# EAGLE board FR4 Panel Rev E.brd (EAGLE 7.2.0), part 1 of 2
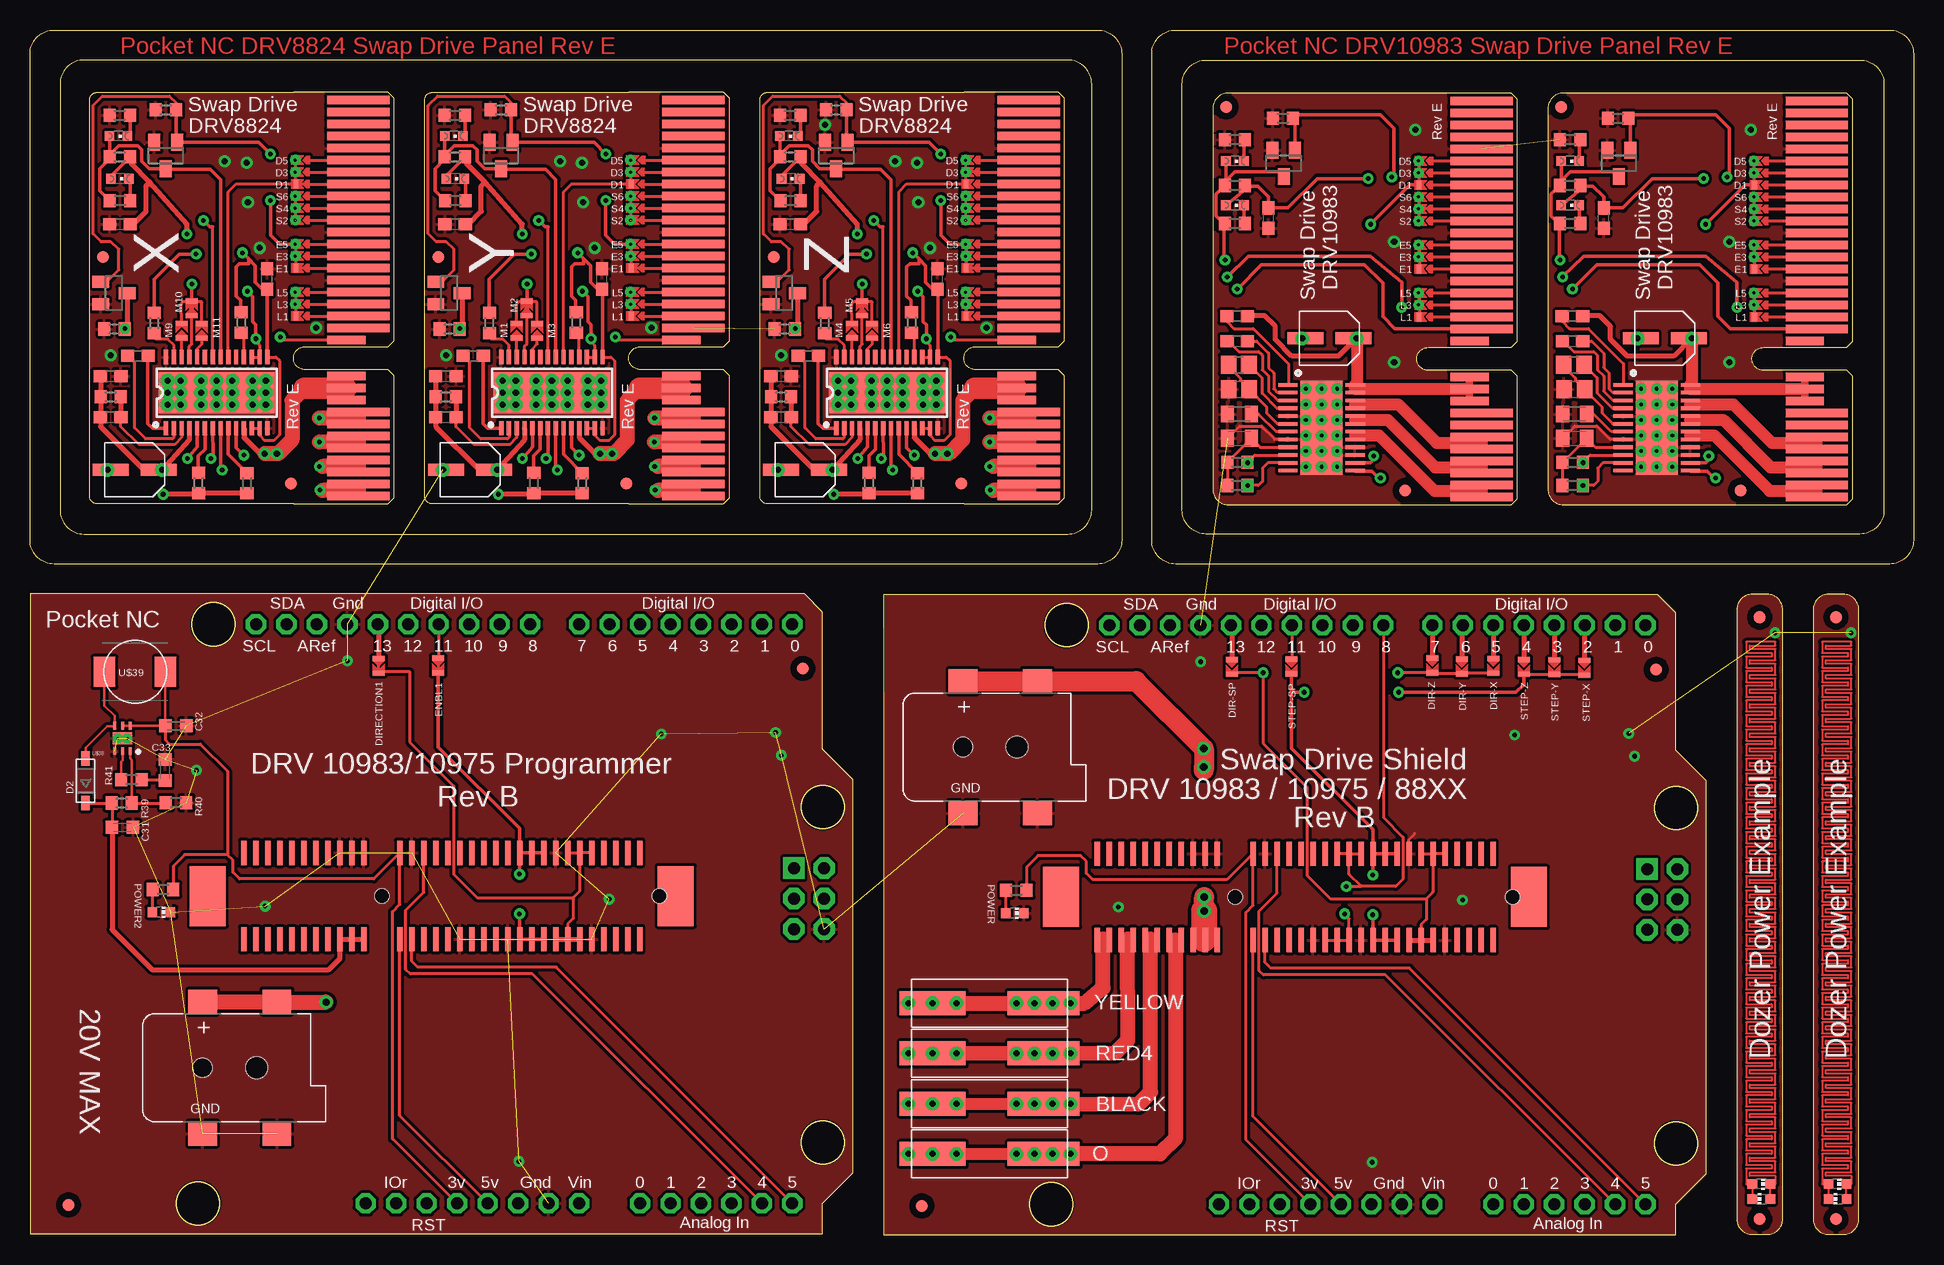
[diagram p0: board, top side]
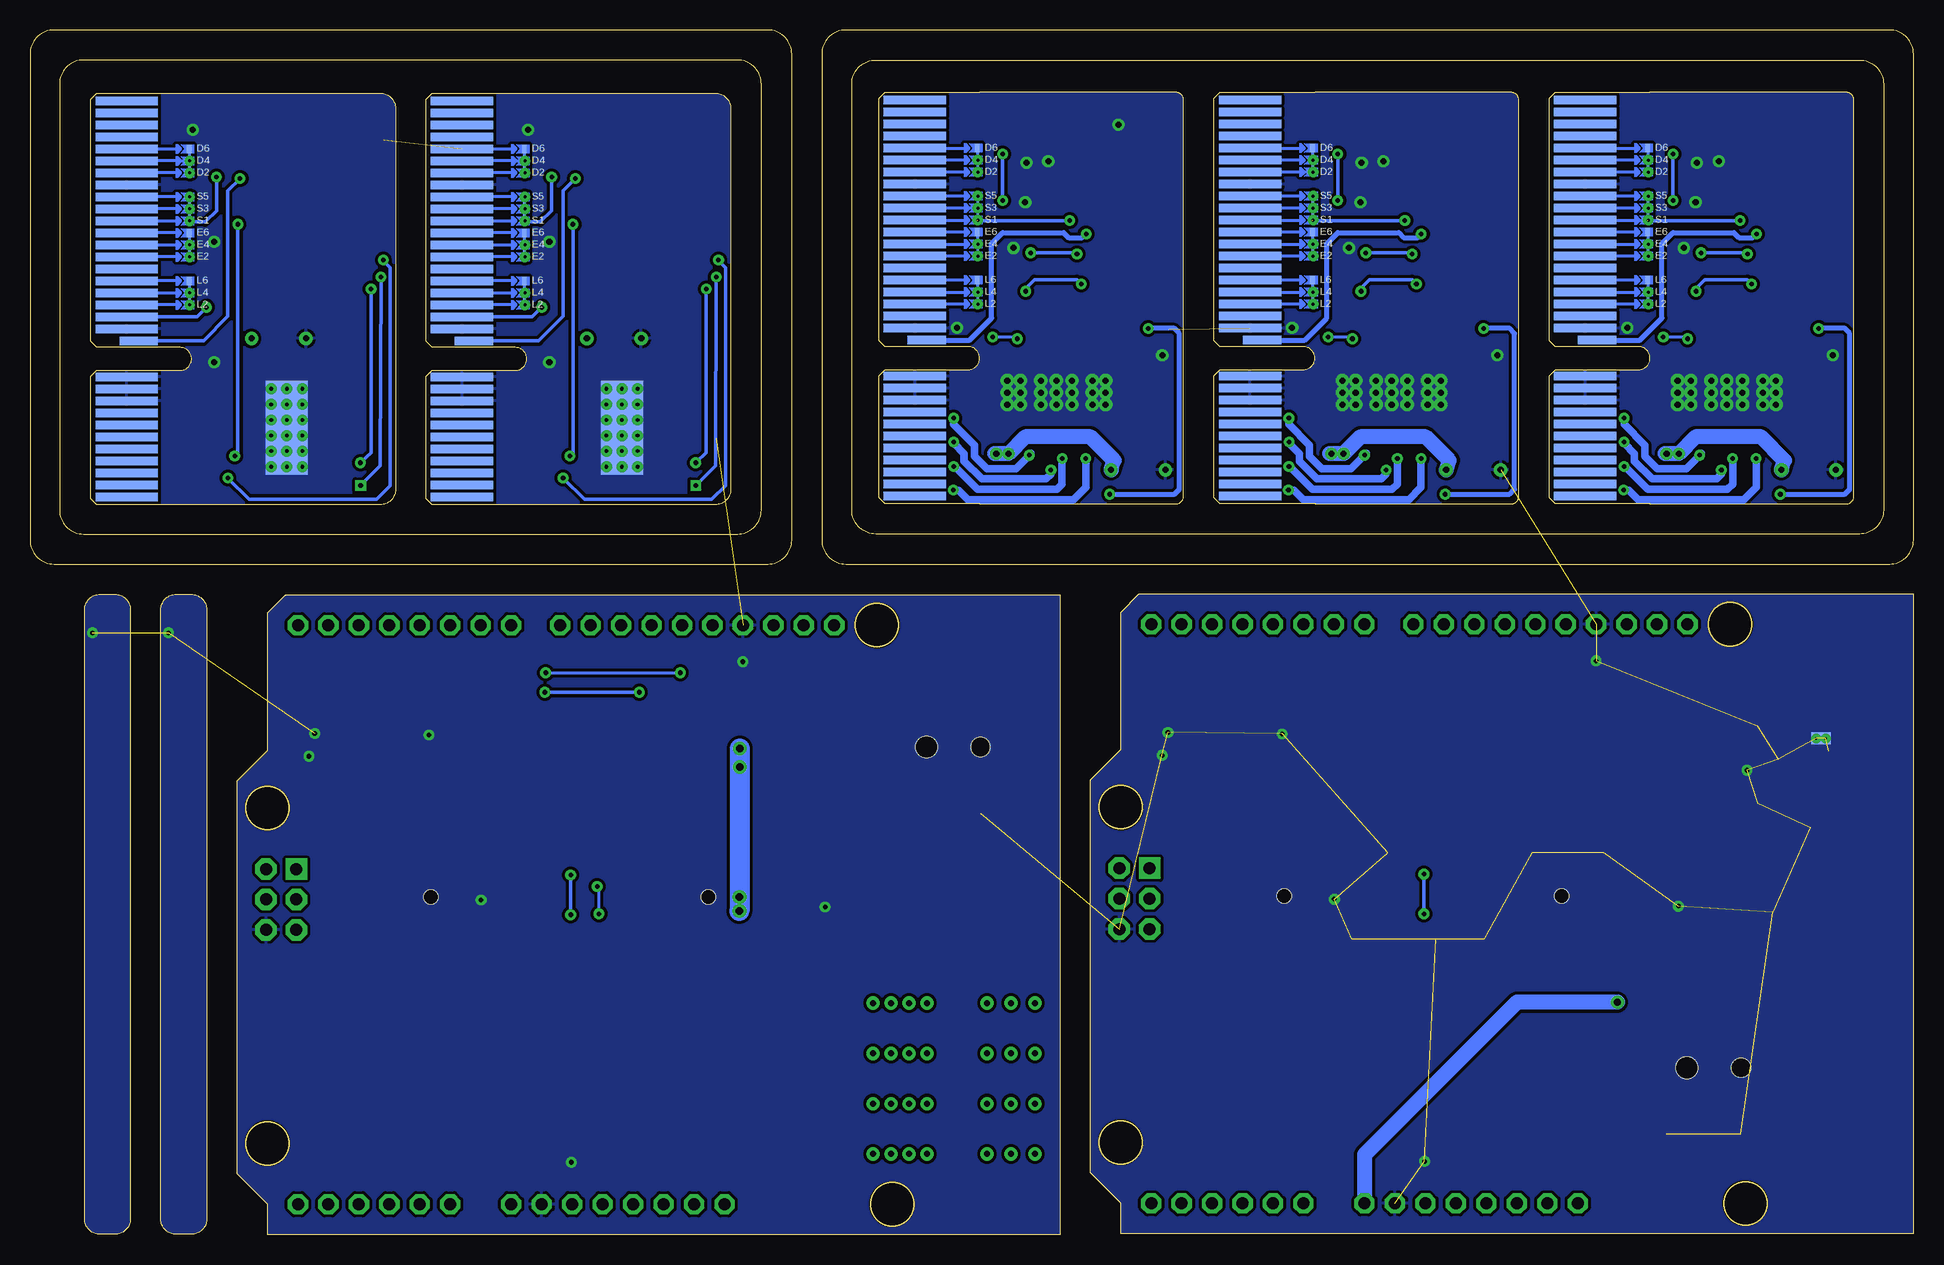
[diagram p1: board, bottom side, seen from below]

Size 157 x 100.4 mm. Coordinates in mm from the lower left corner, seen from the top.
Outline: 21.96,60.9 5.59,60.9 arc-90 4.96,61.53 4.96,94.56 arc-90 5.59,95.2 21.96,95.2
Outline: 49.9,60.9 33.53,60.9 arc-90 32.9,61.53 32.9,94.56 arc-90 33.53,95.2 49.9,95.2
Outline: 77.84,60.9 61.47,60.9 arc-90 60.84,61.53 60.84,94.56 arc-90 61.47,95.2 77.84,95.2
Outline: 115.59,95.14 99.87,95.14 arc90 98.59,93.87 98.59,62.11 arc90 99.87,60.84 115.59,60.84
Outline: 143.53,95.14 127.81,95.14 arc90 126.53,93.87 126.53,62.11 arc90 127.81,60.84 143.53,60.84
Outline: 2.5,95.9 2.5,60.4 arc90 4.5,58.4 86.5,58.4 arc90 88.5,60.4 88.5,95.9 arc90 86.5,97.9 4.5,97.9 arc90 2.5,95.9
Outline: 2,100.4 89,100.4 arc-90 91,98.4 91,57.9 arc-90 89,55.9 2,55.9 arc-90 0,57.9 0,98.4 arc-90 2,100.4
Outline: 152.54,58.4 98.04,58.4 arc-90 96.04,60.4 96.04,95.9 arc-90 98.04,97.9 152.54,97.9 arc-90 154.54,95.9 154.54,60.4 arc-90 152.54,58.4
Outline: 155,55.9 95.5,55.9 arc-90 93.5,57.9 93.5,98.4 arc-90 95.5,100.4 155,100.4 arc-90 157,98.4 157,57.9 arc-90 155,55.9
Outline: 143.55,0.03 144.82,0.03 arc90 146.09,1.3 146.09,52.1 arc90 144.82,53.37 143.55,53.37 arc90 142.28,52.1 142.28,1.3 arc90 143.55,0.03
Outline: 149.9,0.03 151.17,0.03 arc90 152.44,1.3 152.44,52.1 arc90 151.17,53.37 149.9,53.37 arc90 148.63,52.1 148.63,1.3 arc90 149.9,0.03
Copper layers (1*16): Top 0.035mm / dielectric 1.5mm / Bottom 0.035mm
Design rules "SparkFun *": minimum track width 8mil, minimum drill 20mil, track to track 10mil, track to pad 10mil, pad to pad 8mil, via to via 8mil, smd to smd 8mil, copper to edge 2mil, drill to drill 8mil, minimum pad ring 12mil, minimum via ring 10mil, stop-mask expansion 4mil, vias tented up to drill 0.7mm, thermal gap 10mil

## Footprints (pad centres in the part's own frame; a part is rotated, then mirrored left to right if it is on the bottom)
SOT23 = smd 1 x 1.4: 1 -0.95,-1.1; 2 0.95,-1.1; 3 0,1.1
104188-0110 = smd 5.5 x 2: 1@1 0,0 | smd 6 x 2: 1@2 9.25,0 | drill 0.5: 1@3 -2,0; 1@4 0,0; 1@5 2,0; 1@6 7,0; 1@7 8.5,0; 1@9 10,0; 1@10 11.5,0
C0603 = smd 1.1 x 1: 1 -0.85,0; 2 0.85,0
C0805K = smd 1.1 x 1.4: 1 -1,0; 2 1,0
C0805 = smd 1.3 x 1.5: 1 -0.85,0; 2 0.85,0
C0603K = smd 1.05 x 1.08: 1 -0.875,0; 2 0.875,0
DCJACK_2MM_SMT = smd 2.4 x 2: GND 0,-5.5; GNDBREAK 6.2,-5.5; PWR1 0,5.5; PWR2 6.2,5.5 | hole 1.6: 0,0 | hole 1.8: 4.5,0
SOD-123 = smd 1.2 x 0.7: A 1.85,0; C -1.85,0
SELECTIVE_CONNECT = smd 0.4 x 1: P$1 0,0; P$2 1.2,0
HTSSOP-28 = smd 0.36 x 1.19: 1 -4.225,-2.97; 2 -3.575,-2.97; 3 -2.925,-2.97; 4 -2.275,-2.97; 5 -1.625,-2.97; 6 -0.975,-2.97; 7 -0.325,-2.97; 8 0.325,-2.97; 9 0.975,-2.97; 10 1.625,-2.97; 11 2.275,-2.97; 12 2.925,-2.97; 13 3.575,-2.97; 14 4.225,-2.97; 15 4.225,2.97; 16 3.575,2.97; 17 2.925,2.97; 18 2.275,2.97; 19 1.625,2.97; 20 0.975,2.97; 21 0.325,2.97; 22 -0.325,2.97; 23 -0.975,2.97; 24 -1.625,2.97; 25 -2.275,2.97; 26 -2.925,2.97; 27 -3.575,2.97; 28 -4.225,2.97 | drill 0.508: GND@10 -4.1,1; GND@11 -4.1,0; GND@12 -4.1,-1; GND@13 -3,-1; GND@14 -3,0; GND@15 -3,1; GND@16 -1.3,1; GND@17 -1.3,0; GND@18 -1.3,-1; GND@19 0,-1; GND@20 0,0; GND@21 0,1; GND@22 1.3,1; GND@23 1.3,0; GND@24 1.3,-1; GND@25 3,-1; GND@26 3,0; GND@27 3,1; GND@28 4.1,1; GND@29 4.1,0; GND@30 4.1,-1 | smd 9.7 x 3.4: GND@PAD 0,0
CHIPLED_0603 = smd 0.8 x 0.8: A 0,-0.75; C 0,0.75
CHIP-LED0603 = smd 0.8 x 0.8: A 0,-0.75; C 0,0.75
ARDUINOR3_ICSP = drill 1 pad 1.676 octagon: 3V 35.56,2.54; 5V 38.1,2.54; A0 50.8,2.54; A1 53.34,2.54; A2 55.88,2.54; A3 58.42,2.54; A4 60.96,2.54; A5 63.5,2.54; AREF 23.876,50.8; D0 63.5,50.8; D1 60.96,50.8; D2 58.42,50.8; D3 55.88,50.8; D4 53.34,50.8; D5 50.8,50.8; D6 48.26,50.8; D7 45.72,50.8; D8 41.656,50.8; D9 39.116,50.8; D10 36.576,50.8; D11 34.036,50.8; D12 31.496,50.8; D13 28.956,50.8; GND 26.416,50.8; GND@1 43.18,2.54; GND@2 40.64,2.54; IOREF 30.48,2.54; RESERVED 27.94,2.54; RESET 33.02,2.54; SCL 18.796,50.8; SDA 21.336,50.8; VIN 45.72,2.54 | drill 1 pad 1.778 octagon: 5V_ICSP 66.167,30.48; GND@3 66.167,25.4; MOSI 66.167,27.94; RESET_ICSP 63.627,25.4; SCK 63.627,27.94 | drill 1 pad 1.778 square: MISO 63.627,30.48
R0603 = smd 1 x 1.1: 1 -0.85,0; 2 0.85,0
PCIE_64_SMART_BOARD = smd 0.7 x 5.2 bottom: GND@1 8.65,3; GND@2 9.65,3; GND@3 10.65,3; P$1 0.65,3; P$2 1.65,3; P$3 2.65,3; P$4 3.65,3; P$5 4.65,3; P$6 5.65,3; P$7 6.65,3; P$8 7.65,3; P$13 14.65,3; P$14 15.65,3; P$15 16.65,3; P$16 17.65,3; P$17 18.65,3; P$18 19.65,3; P$19 20.65,3; P$20 21.65,3; P$21 22.65,3; P$22 23.65,3; P$23 24.65,3; P$24 25.65,3; P$25 26.65,3; P$26 27.65,3; P$27 28.65,3; P$28 29.65,3; P$29 30.65,3; P$30 31.65,3; P$31 32.65,3; P$32 33.65,3 | smd 0.7 x 3.2 bottom: P$12 13.65,4 | smd 0.7 x 0.4 bottom: P$15@1 16.65,8.2; P$16@1 17.65,8.2; P$17@1 18.65,8.2; P$19@1 20.65,8.2; P$20@1 21.65,8.2; P$21@1 22.65,8.2; P$22@1 23.65,8.2; P$23@1 24.65,8.2; P$24@1 25.65,8.2; P$26@1 27.65,8.2; P$27@1 28.65,8.2; P$28@1 29.65,8.2 | smd 0.7 x 5.2: P$33 0.65,3; P$34 1.65,3; P$35 2.65,3; P$36 3.65,3; P$37 4.65,3; P$38 5.65,3; P$39 6.65,3; P$40 7.65,3; P$45 14.65,3; P$46 15.65,3; P$47 16.65,3; P$48 17.65,3; P$49 18.65,3; P$50 19.65,3; P$51 20.65,3; P$52 21.65,3; P$53 22.65,3; P$54 23.65,3; P$55 24.65,3; P$56 25.65,3; P$57 26.65,3; P$58 27.65,3; P$59 28.65,3; P$60 29.65,3; P$61 30.65,3; P$62 31.65,3; P$63 32.65,3; P$64 33.65,3 | drill 0.254 pad 0.305: P$41 21.65,8.25; P$42 17.65,8.25; P$43 16.65,8.25; P$65 20.65,8.25; P$66 23.65,8.25; P$67 24.65,8.25; P$68 27.65,8.25; P$69 28.65,8.25; P$70 25.65,8.25 | smd 0.7 x 3.2: P$44 13.65,4; VCC@1 8.65,4; VCC@2 9.65,4; VCC@3 10.65,4 | smd 0.7 x 0.4: P$46@1 15.65,8.2; P$47@1 16.65,8.2; P$48@1 17.65,8.2; P$50@1 19.65,8.2; P$51@1 20.65,8.2; P$52@1 21.65,8.2; P$54@1 23.65,8.2; P$55@1 24.65,8.2; P$56@1 25.65,8.2; P$57@1 26.65,8.2; P$58@1 27.65,8.2; P$59@1 28.65,8.2
HTSS0P-24 = smd 7.8 x 3.5 bottom: GND 0,0 | smd 7.8 x 3.5: GND@1 0,0 | drill 0.3: GND@3 -3.25,1.3; GND@4 -1.95,1.3; GND@5 -0.65,1.3; GND@6 0.65,1.3; GND@7 1.95,1.3; GND@8 3.25,1.3; GND@9 3.25,0; GND@10 1.95,0; GND@11 0.65,0; GND@12 -0.65,0; GND@13 -1.95,0; GND@14 -3.25,0; GND@15 -3.25,-1.3; GND@16 -1.95,-1.3; GND@17 -0.65,-1.3; GND@18 0.65,-1.3; GND@19 1.95,-1.3; GND@20 3.25,-1.3 | smd 0.3 x 1.6: P$1 -3.575,-2.8; P$2 -2.925,-2.8; P$3 -2.275,-2.8; P$4 -1.625,-2.8; P$5 -0.975,-2.8; P$6 -0.325,-2.8; P$7 0.325,-2.8; P$8 0.975,-2.8; P$9 1.625,-2.8; P$10 2.275,-2.8; P$11 2.925,-2.8; P$12 3.575,-2.8; P$13 3.575,2.8; P$14 2.925,2.8; P$15 2.275,2.8; P$16 1.625,2.8; P$17 0.975,2.8; P$18 0.325,2.8; P$19 -0.325,2.8; P$20 -0.975,2.8; P$21 -1.625,2.8; P$22 -2.275,2.8; P$23 -2.925,2.8; P$24 -3.575,2.8
EEEFK0J220R = smd 1 x 3: GND@1 0,-2; P$1 0,2 | drill 0.508: GND@2 0,-2.27; P$3 0,2.27
FIDUCIAL_1MM = smd 1 x 1: 1 0,0
10076266-100CLF = smd 0.457 x 2.032: P$1 0,0; P$2 1,0; P$3 2,0; P$4 3,0; P$5 4,0; P$6 5,0; P$7 6,0; P$8 7,0; P$9 8,0; P$10 9,0; P$11 10,0; P$12 13,0; P$13 14,0; P$14 15,0; P$15 16,0; P$16 17,0; P$17 18,0; P$18 19,0; P$19 20,0; P$20 21,0; P$21 22,0; P$22 23,0; P$23 24,0; P$24 25,0; P$25 26,0; P$26 27,0; P$27 28,0; P$28 29,0; P$29 30,0; P$30 31,0; P$31 32,0; P$32 33,0; P$33 0,-7.2; P$34 1,-7.2; P$35 2,-7.2; P$36 3,-7.2; P$37 4,-7.2; P$38 5,-7.2; P$39 6,-7.2; P$40 7,-7.2; P$41 8,-7.2; P$42 9,-7.2; P$43 10,-7.2; P$44 13,-7.2; P$45 14,-7.2; P$46 15,-7.2; P$47 16,-7.2; P$48 17,-7.2; P$49 18,-7.2; P$50 19,-7.2; P$51 20,-7.2; P$52 21,-7.2; P$53 22,-7.2; P$54 23,-7.2; P$55 24,-7.2; P$56 25,-7.2; P$57 26,-7.2; P$58 27,-7.2; P$59 28,-7.2; P$60 29,-7.2; P$61 30,-7.2; P$62 31,-7.2; P$63 32,-7.2; P$64 33,-7.2 | smd 3 x 5: SOLDER-NAIL@1 -3,-3.6; SOLDER-NAIL@2 36,-3.6 | hole 1.2: 11.5,-3.6; 34.65,-3.6
2X2QFN = smd 0.25 x 0.65: P$1 -0.65,1.05; P$2 0,1.05; P$3 0.65,1.05; P$4 0.65,-1.05; P$5 0,-1.05; P$6 -0.65,-1.05 | smd 1.6 x 1: P$7 0,0 | drill 0.2: P$8 -0.4,0; P$9 0.4,0 | smd 1.6 x 1 bottom: P$10 0,0
LQH55 = smd 1.8 x 2.5: 1 -2.55,0; 2 2.55,0

## Placement (x,y rotation side)
2N7002P  [SOT23]  104.5,89.29 180 top
2N7002P1  [SOT23]  132.44,89.29 180 top
2N7002P2  [SOT23]  39.26,89.93 180 top
2N7002P3  [SOT23]  34.93,78.48 270 top
2N7002P5  [SOT23]  11.32,89.93 180 top
2N7002P6  [SOT23]  6.99,78.48 270 top
2N7002P7  [SOT23]  67.2,89.93 180 top
2N7002P8  [SOT23]  62.87,78.48 270 top
BLACK  104188-0110  [104188-0110]  75.23,10.92 0 top
C1  4.7uf  [C0603]  47.7,79.65 90 top
C2  .1uf  [C0603]  100.62,76.54 180 top
C3  .1uf  [C0603]  100.63,74.47 0 top
C4  [C0805K]  100.82,68.4 0 top
C5  10uf  [C0805]  100.78,70.45 0 top
C6  .01uf  [C0603]  36.94,73.25 0 top
C7  [C0805K]  100.82,66.37 0 top
C8  .1uf  [C0603]  34.67,71.55 0 top
C9  .1uf  [C0603]  34.67,68.14 0 top
C10  .1uf  [C0603]  35.44,84.22 0 top
C11  4.7uf  [C0603]  75.64,79.65 90 top
C12  .01uf  [C0603]  64.88,73.25 0 top
C13  .1uf  [C0603]  62.61,71.55 0 top
C14  .1uf  [C0603]  62.61,68.14 0 top
C15  .1uf  [C0603]  63.38,84.22 0 top
C16  .1uf  [C0603]  103.23,84.72 90 top
C17  .1uf  [C0603]  128.56,76.54 180 top
C18  .1uf  [C0603]  128.57,74.47 0 top
C19  10uf  [C0805]  128.72,70.45 0 top
C20  [C0805K]  128.76,66.37 0 top
C21  [C0805K]  128.76,68.4 0 top
C22  .1uf  [C0603]  131.17,84.72 90 top
C26  4.7uf  [C0603]  19.76,79.65 90 top
C27  .01uf  [C0603]  9,73.25 0 top
C28  .1uf  [C0603]  6.73,71.55 0 top
C29  .1uf  [C0603]  6.73,68.14 0 top
C30  .1uf  [C0603]  7.5,84.22 0 top
C31  4.7uf  [C0603K]  7.71,33.95 0 top
C32  4.7uf  [C0603K]  12.15,42.41 0 top
C33  .01uf  [C0603K]  11.27,38.73 90 top
CN1  [DCJACK_2MM_SMT]  77.77,40.64 0 top
CN3  [DCJACK_2MM_SMT]  14.39,13.92 0 top
D2  [SOD-123]  4.63,37.83 90 top
DIR-SP  SELECTIVE_CONNECT  [SELECTIVE_CONNECT]  100.17,47.93 270 top
DIR-X  SELECTIVE_CONNECT  [SELECTIVE_CONNECT]  121.97,48.01 270 top
DIR-Y  SELECTIVE_CONNECT  [SELECTIVE_CONNECT]  119.37,47.96 270 top
DIR-Z  SELECTIVE_CONNECT  [SELECTIVE_CONNECT]  116.91,48.03 270 top
DIRECTION1  SELECTIVE_CONNECT  [SELECTIVE_CONNECT]  29.05,48.01 270 top
DRV1  DRV8824  [HTSSOP-28]  43.5,70.17 0 top
DRV2  DRV8824  [HTSSOP-28]  71.44,70.17 0 top
DRV3  DRV8824  [HTSSOP-28]  15.56,70.17 0 top
ENBL1  SELECTIVE_CONNECT  [SELECTIVE_CONNECT]  34.03,48.03 270 top
GRN  [CHIPLED_0603]  100.44,85.8 270 top
GRN1  [CHIPLED_0603]  128.38,85.8 270 top
GRN2  [CHIPLED_0603]  35.45,88 270 top
GRN3  [CHIPLED_0603]  63.39,88 270 top
GRN5  [CHIPLED_0603]  7.51,88 270 top
L1  47uh  [C0805]  100.76,72.51 0 top
L2  47uh  [C0805]  128.7,72.51 0 top
LED1  [CHIP-LED0603]  144.31,4.22 270 top
LED2  [CHIP-LED0603]  144.31,3 90 top
LED3  [CHIP-LED0603]  150.66,4.22 270 top
LED4  [CHIP-LED0603]  150.66,3 90 top
M1  SELECTIVE_CONNECT  [SELECTIVE_CONNECT]  40.58,74.74 90 top
M2  SELECTIVE_CONNECT  [SELECTIVE_CONNECT]  41.42,76.6 90 top
M3  SELECTIVE_CONNECT  [SELECTIVE_CONNECT]  42.27,74.73 90 top
M4  SELECTIVE_CONNECT  [SELECTIVE_CONNECT]  68.52,74.74 90 top
M5  SELECTIVE_CONNECT  [SELECTIVE_CONNECT]  69.36,76.6 90 top
M6  SELECTIVE_CONNECT  [SELECTIVE_CONNECT]  70.21,74.73 90 top
M7  ARDUINO_R3_ICSP  [ARDUINOR3_ICSP]  71.17,0 0 top
M9  SELECTIVE_CONNECT  [SELECTIVE_CONNECT]  12.64,74.74 90 top
M10  SELECTIVE_CONNECT  [SELECTIVE_CONNECT]  13.48,76.6 90 top
M11  SELECTIVE_CONNECT  [SELECTIVE_CONNECT]  14.33,74.73 90 top
M12  ARDUINO_R3_ICSP  [ARDUINOR3_ICSP]  0.04,0.08 0 top
O  104188-0110  [104188-0110]  75.23,6.73 0 top
POWER  [CHIP-LED0603]  82.09,26.8 270 top
POWER2  [CHIP-LED0603]  10.96,26.87 270 top
R1  5k  [R0603]  100.64,64.37 0 top
R2  5k  [R0603]  100.64,62.44 0 top
R3  10k  [R0603]  104.44,93.04 0 top
R4  460  [R0603]  100.44,87.45 0 top
R5  460  [R0603]  100.44,91.26 180 top
R6  10k  [R0603]  45.55,76.02 90 top
R7  10k  [R0603]  38.3,75.97 90 top
R8  [R0603]  42,62.65 90 top
R9  [R0603]  46.03,62.62 90 top
R10  460  [R0603]  100.44,84.27 180 top
R11  5k  [R0603]  128.58,64.37 0 top
R12  1m  [R0603]  34.67,69.83 0 top
R13  10k  [R0603]  39.26,93.74 0 top
R14  460  [R0603]  35.43,89.83 0 top
R15  460  [R0603]  35.43,93.28 180 top
R16  460  [R0603]  35.45,86.17 180 top
R17  [R0603]  34.98,75.48 0 top
R18  10k  [R0603]  73.49,76.02 90 top
R19  10k  [R0603]  66.24,75.97 90 top
R20  [R0603]  69.94,62.65 90 top
R21  [R0603]  73.97,62.62 90 top
R22  1m  [R0603]  62.61,69.83 0 top
R23  10k  [R0603]  67.2,93.74 0 top
R24  460  [R0603]  63.37,89.83 0 top
R25  460  [R0603]  63.37,93.28 180 top
R26  460  [R0603]  63.39,86.17 180 top
R27  [R0603]  62.92,75.48 0 top
R28  5k  [R0603]  128.58,62.44 0 top
R29  10k  [R0603]  132.38,93.04 0 top
R30  460  [R0603]  128.38,87.45 0 top
R31  460  [R0603]  128.38,91.26 180 top
R32  460  [R0603]  128.38,84.27 180 top
R33  460  [R0603]  82.21,28.7 180 top
R38  460  [R0603]  11.09,28.78 180 top
R39  178k  [R0603]  7.64,35.97 180 top
R40  10k  [R0603]  12.18,36.01 180 top
R41  10k  [R0603]  8.47,37.92 0 top
R42  10k  [R0603]  17.61,76.02 90 top
R43  10k  [R0603]  10.36,75.97 90 top
R44  [R0603]  14.06,62.65 90 top
R45  [R0603]  18.09,62.62 90 top
R46  1m  [R0603]  6.73,69.83 0 top
R47  10k  [R0603]  11.32,93.74 0 top
R48  460  [R0603]  7.49,89.83 0 top
R49  460  [R0603]  7.49,93.28 180 top
R50  460  [R0603]  7.51,86.17 180 top
R51  [R0603]  7.04,75.48 0 top
RED  [CHIPLED_0603]  100.44,89.48 270 top
RED1  [CHIPLED_0603]  128.38,89.48 270 top
RED2  [CHIPLED_0603]  35.33,91.56 270 top
RED3  [CHIPLED_0603]  63.27,91.56 270 top
RED4  104188-0110  [104188-0110]  75.23,15.11 0 top
RED5  [CHIPLED_0603]  7.39,91.56 270 top
STEP-SP  SELECTIVE_CONNECT  [SELECTIVE_CONNECT]  105.15,47.96 270 top
STEP-X  SELECTIVE_CONNECT  [SELECTIVE_CONNECT]  129.56,47.85 270 top
STEP-Y  SELECTIVE_CONNECT  [SELECTIVE_CONNECT]  127.07,47.9 270 top
STEP-Z  SELECTIVE_CONNECT  [SELECTIVE_CONNECT]  124.51,47.93 270 top
U$1  [PCIE_64_SMART_BOARD]  123.99,60.84 90 top
U$2  DRV10983  [HTSS0P-24]  107.65,67.25 270 top
U$3  10uf  [EEEFK0J220R]  108.31,74.71 270 top
U$4  FIDUCIAL  [FIDUCIAL_1MM]  99.69,93.99 90 top
U$5  FIDUCIAL  [FIDUCIAL_1MM]  114.64,62.03 90 top
U$6  [PCIE_64_SMART_BOARD]  58.3,60.9 90 top
U$7  EEEFK0J220R  [EEEFK0J220R]  36.68,63.74 270 top
U$8  FIDUCIAL  [FIDUCIAL_1MM]  49.69,62.6 90 top
U$9  FIDUCIAL  [FIDUCIAL_1MM]  34.04,81.47 90 top
U$10  [PCIE_64_SMART_BOARD]  86.24,60.9 90 top
U$11  EEEFK0J220R  [EEEFK0J220R]  64.62,63.74 270 top
U$12  FIDUCIAL  [FIDUCIAL_1MM]  77.63,62.6 90 top
U$13  FIDUCIAL  [FIDUCIAL_1MM]  61.98,81.47 90 top
U$14  [PCIE_64_SMART_BOARD]  151.93,60.84 90 top
U$15  DRV10983  [HTSS0P-24]  135.59,67.25 270 top
U$16  10uf  [EEEFK0J220R]  136.25,74.71 270 top
U$17  FIDUCIAL  [FIDUCIAL_1MM]  127.63,93.99 90 top
U$18  FIDUCIAL  [FIDUCIAL_1MM]  142.58,62.03 90 top
U$19  10061913-101CLF  [10076266-100CLF]  88.95,31.75 0 top
U$20  FIDUCIAL  [FIDUCIAL_1MM]  74.34,2.41 0 top
U$21  FIDUCIAL  [FIDUCIAL_1MM]  135.55,47.12 0 top
U$23  [PCIE_64_SMART_BOARD]  30.36,60.9 90 top
U$24  EEEFK0J220R  [EEEFK0J220R]  8.74,63.74 270 top
U$25  FIDUCIAL  [FIDUCIAL_1MM]  21.75,62.6 90 top
U$26  FIDUCIAL  [FIDUCIAL_1MM]  6.1,81.47 90 top
U$31  FIDUCIAL  [FIDUCIAL_1MM]  144.19,51.46 90 top
U$32  FIDUCIAL  [FIDUCIAL_1MM]  144.19,1.3 90 top
U$33  FIDUCIAL  [FIDUCIAL_1MM]  150.54,51.46 90 top
U$34  FIDUCIAL  [FIDUCIAL_1MM]  150.54,1.3 90 top
U$35  10061913-101CLF  [10076266-100CLF]  17.82,31.83 0 top
U$36  FIDUCIAL  [FIDUCIAL_1MM]  3.22,2.49 0 top
U$37  FIDUCIAL  [FIDUCIAL_1MM]  64.43,47.19 0 top
U$38  TPS61170DRVR  [2X2QFN]  7.71,41.36 180 top
U$39  L-LQH55  [LQH55]  8.76,46.91 180 top
YELLOW  104188-0110  [104188-0110]  75.23,19.3 0 top

## Library data of the parts
2N7002P 2N7002P1-2N7002P3 2N7002P5-2N7002P8 C1-C22 C26-C33 CN1 CN3 D2 GRN GRN1-GRN3 GRN5 L1 L2 LED1-LED4 M7 M12 POWER POWER2 R1-R33 R38-R51 RED RED1-RED3 RED5 U$4 U$5 U$8 U$9 U$12 U$13 U$17 U$18 U$20 U$21 U$25 U$26 U$31-U$34 U$36 U$37 U$39 = adafruit
BLACK DIR-SP DIR-X DIR-Y DIR-Z DIRECTION1 DRV1-DRV3 ENBL1 M1-M6 M9-M11 O RED4 STEP-SP STEP-X STEP-Y STEP-Z U$1-U$3 U$6 U$7 U$10 U$11 U$14-U$16 U$19 U$23 U$24 U$35 U$38 YELLOW = PocketNC

## Nets
3.3V1: C1.1 DRV1.12 DRV1.13 DRV1.15 R6.2 R7.2
3.3V2: C11.1 DRV2.12 DRV2.13 DRV2.15 R18.2 R19.2
3.3V3: C26.1 DRV3.12 DRV3.13 DRV3.15 R42.2 R43.2
3V: C16.2 GRN.A R4.2 U$1.P$12
3V1: C10.2 GRN2.A R14.2 U$6.P$12
3V2: C15.2 GRN3.A R24.2 U$10.P$12
3V3: C22.2 GRN1.A R30.2 U$14.P$12
3V5: C30.2 GRN5.A R48.2 U$23.P$12
3V6: M7.3V R33.1 U$19.P$12
3V8: C32.1 M12.3V R38.1 U$35.P$12 U$38.P$5 U$38.P$6 U$39.1
5V: M7.5V U$19.P$44
5V1: DRV1.16 DRV1.17 M1.P$2 M2.P$2 M3.P$2 U$6.P$44
5V2: DRV2.16 DRV2.17 M4.P$2 M5.P$2 M6.P$2 U$10.P$44
5V3: DRV3.16 DRV3.17 M9.P$2 M10.P$2 M11.P$2 U$23.P$44
5V5: M12.5V U$35.P$44
23V1: C31.1 D2.C R39.2 U$35.P$41 U$35.P$42 U$35.P$43
A1: DRV1.5 U$6.P$33 U$6.P$34
A2: DRV1.7 U$6.P$35 U$6.P$36
A3: DRV2.5 U$10.P$33 U$10.P$34
A4: DRV2.7 U$10.P$35 U$10.P$36
A7: DRV3.5 U$23.P$33 U$23.P$34
A8: DRV3.7 U$23.P$35 U$23.P$36
B1: DRV1.8 U$6.P$37 U$6.P$38
B2: DRV1.10 U$6.P$39 U$6.P$40
B3: DRV2.8 U$10.P$37 U$10.P$38
B4: DRV2.10 U$10.P$39 U$10.P$40
B5: U$19.P$1
B6: U$19.P$2
B7: DRV3.8 U$23.P$37 U$23.P$38
B8: DRV3.10 U$23.P$39 U$23.P$40
B9: U$19.P$3
B10: U$19.P$4
B11: U$19.P$5
B17: U$35.P$1
B18: U$35.P$2
B19: U$35.P$3
B20: U$35.P$4
B21: U$35.P$5
CHANGE_A: 2N7002P6.3 R44.1 R45.1 R51.2
CHANGE_A1: 2N7002P3.3 R8.1 R9.1 R17.2
CHANGE_A2: 2N7002P8.3 R20.1 R21.1 R27.2
DIR: U$1.P$57@1 U$2.P$14
DIR1: DRV1.20 U$6.P$57@1
DIR2: DRV2.20 U$10.P$57@1
DIR3: U$14.P$57@1 U$15.P$14
DIR5: DRV3.20 U$23.P$57@1
DIR6: DIR-SP.P$2 DIR-X.P$2 DIR-Y.P$2 DIR-Z.P$2 U$19.P$26 U$19.P$27 U$19.P$28 U$19.P$57 U$19.P$58 U$19.P$59
DIR8: DIRECTION1.P$2 U$35.P$26 U$35.P$27 U$35.P$28 U$35.P$57 U$35.P$58 U$35.P$59
ENBL: M7.D8 U$19.P$19 U$19.P$20 U$19.P$21 U$19.P$50 U$19.P$51 U$19.P$52
ENBL-IN: 2N7002P.1 R3.2 U$1.P$22@1
ENBL-IN1: 2N7002P2.1 2N7002P3.1 R13.2 U$6.P$50@1
ENBL-IN2: 2N7002P7.1 2N7002P8.1 R23.2 U$10.P$50@1
ENBL-IN3: 2N7002P5.1 2N7002P6.1 R47.2 U$23.P$50@1
ENBL-IN4: 2N7002P1.1 R29.2 U$14.P$22@1
ENBL-OUT: 2N7002P.3 R4.1 R10.2 RED.A U$2.P$13
ENBL-OUT1: 2N7002P2.3 DRV1.21 R14.1 R16.2 RED2.A
ENBL-OUT2: 2N7002P7.3 DRV2.21 R24.1 R26.2 RED3.A
ENBL-OUT3: 2N7002P5.3 DRV3.21 R48.1 R50.2 RED5.A
ENBL-OUT4: 2N7002P1.3 R30.1 R32.2 RED1.A U$15.P$13
FB1: R39.1 R40.2 U$38.P$1
GND: 2N7002P1.2 2N7002P2.2 2N7002P3.2 2N7002P7.2 2N7002P8.2 2N7002P.2 C1.2 C4.1 C5.1 C7.1 C8.2 C10.1 C11.2 C13.2 C15.1 C16.1 C19.1 C20.1 C21.1 C22.1 C31.2 C32.2 C33.2 CN1.GND CN1.GNDBREAK CN3.GND CN3.GNDBREAK DRV1.14 DRV1.28 DRV1.GND@10 DRV1.GND@11 DRV1.GND@12 DRV1.GND@13 DRV1.GND@14 DRV1.GND@15 DRV1.GND@16 DRV1.GND@17 DRV1.GND@18 DRV1.GND@19 DRV1.GND@20 DRV1.GND@21 DRV1.GND@22 DRV1.GND@23 DRV1.GND@24 DRV1.GND@25 DRV1.GND@26 DRV1.GND@27 DRV1.GND@28 DRV1.GND@29 DRV1.GND@30 DRV1.GND@PAD DRV2.14 DRV2.28 DRV2.GND@10 DRV2.GND@11 DRV2.GND@12 DRV2.GND@13 DRV2.GND@14 DRV2.GND@15 DRV2.GND@16 DRV2.GND@17 DRV2.GND@18 DRV2.GND@19 DRV2.GND@20 DRV2.GND@21 DRV2.GND@22 DRV2.GND@23 DRV2.GND@24 DRV2.GND@25 DRV2.GND@26 DRV2.GND@27 DRV2.GND@28 DRV2.GND@29 DRV2.GND@30 DRV2.GND@PAD M7.GND M7.GND@1 M7.GND@3 M12.GND M12.GND@1 M12.GND@3 POWER2.C POWER.C R3.1 R5.2 R13.1 R15.2 R17.1 R23.1 R25.2 R27.1 R29.1 R31.2 R40.1 U$1.GND@1 U$1.GND@2 U$1.GND@3 U$1.P$13 U$1.P$25 U$1.P$49 U$1.P$53 U$1.P$60 U$2.GND U$2.GND@1 U$2.GND@3 U$2.GND@4 U$2.GND@5 U$2.GND@6 U$2.GND@7 U$2.GND@8 U$2.GND@9 U$2.GND@10 U$2.GND@11 U$2.GND@12 U$2.GND@13 U$2.GND@14 U$2.GND@15 U$2.GND@16 U$2.GND@17 U$2.GND@18 U$2.GND@19 U$2.GND@20 U$2.P$5 U$2.P$8 U$2.P$15 U$2.P$16 U$3.GND@2 U$6.GND@1 U$6.GND@2 U$6.GND@3 U$6.P$13 U$6.P$25 U$6.P$49 U$6.P$53 U$6.P$60 U$7.GND@2 U$10.GND@1 U$10.GND@2 U$10.GND@3 U$10.P$13 U$10.P$25 U$10.P$49 U$10.P$53 U$10.P$60 U$11.GND@2 U$14.GND@1 U$14.GND@2 U$14.GND@3 U$14.P$13 U$14.P$25 U$14.P$49 U$14.P$53 U$14.P$60 U$15.GND U$15.GND@1 U$15.GND@3 U$15.GND@4 U$15.GND@5 U$15.GND@6 U$15.GND@7 U$15.GND@8 U$15.GND@9 U$15.GND@10 U$15.GND@11 U$15.GND@12 U$15.GND@13 U$15.GND@14 U$15.GND@15 U$15.GND@16 U$15.GND@17 U$15.GND@18 U$15.GND@19 U$15.GND@20 U$15.P$5 U$15.P$8 U$15.P$15 U$15.P$16 U$16.GND@2 U$19.P$9 U$19.P$10 U$19.P$11 U$19.P$13 U$19.P$25 U$19.P$49 U$19.P$53 U$19.P$60 U$35.P$9 U$35.P$10 U$35.P$11 U$35.P$13 U$35.P$25 U$35.P$49 U$35.P$53 U$35.P$60 U$38.P$3 U$38.P$7 U$38.P$8 U$38.P$9 U$38.P$10
GND5: 2N7002P5.2 2N7002P6.2 C26.2 C28.2 C30.1 DRV3.14 DRV3.28 DRV3.GND@10 DRV3.GND@11 DRV3.GND@12 DRV3.GND@13 DRV3.GND@14 DRV3.GND@15 DRV3.GND@16 DRV3.GND@17 DRV3.GND@18 DRV3.GND@19 DRV3.GND@20 DRV3.GND@21 DRV3.GND@22 DRV3.GND@23 DRV3.GND@24 DRV3.GND@25 DRV3.GND@26 DRV3.GND@27 DRV3.GND@28 DRV3.GND@29 DRV3.GND@30 DRV3.GND@PAD R47.1 R49.2 R51.1 U$23.GND@1 U$23.GND@2 U$23.GND@3 U$23.P$13 U$23.P$25 U$23.P$49 U$23.P$53 U$23.P$60 U$24.GND@2
N$1: C2.2 U$2.P$1
N$2: C3.2 U$2.P$2
N$3: C3.1 U$2.P$3
N$4: DRV1.6 R8.2
N$5: GRN.C R10.1
N$6: C4.2 U$2.P$7
N$7: DRV1.27 R7.1
N$8: R5.1 RED.C
N$9: C17.2 U$15.P$1
N$10: DRV1.26 M1.P$1
N$11: DRV1.25 M2.P$1
N$12: DRV1.24 M3.P$1
N$13: C6.2 DRV1.1
N$14: C6.1 DRV1.2
N$15: DRV1.9 R9.2
N$16: DRV1.18 R6.1
N$17: GRN2.C R16.1
N$18: R15.1 RED2.C
N$20: DRV2.6 R20.2
N$21: DRV2.27 R19.1
N$22: DRV2.26 M4.P$1
N$23: DRV2.25 M5.P$1
N$24: DRV2.24 M6.P$1
N$25: C12.2 DRV2.1
N$26: C12.1 DRV2.2
N$27: DRV2.9 R21.2
N$28: DRV2.18 R18.1
N$29: GRN3.C R26.1
N$30: R25.1 RED3.C
N$32: C18.2 U$15.P$2
N$33: C18.1 U$15.P$3
N$34: C21.2 U$15.P$7
N$35: GRN1.C R32.1
N$36: R31.1 RED1.C
N$37: POWER.A R33.2
N$38: M7.D2 STEP-X.P$1
N$39: M7.D3 STEP-Y.P$1
N$40: M7.D4 STEP-Z.P$1
N$42: DIR-SP.P$1 M7.D13
N$43: DIR-Z.P$1 M7.D7
N$48: DRV3.6 R44.2
N$49: DRV3.27 R43.1
N$50: DRV3.26 M9.P$1
N$51: DRV3.25 M10.P$1
N$52: DRV3.24 M11.P$1
N$53: C27.2 DRV3.1
N$54: C27.1 DRV3.2
N$55: DRV3.9 R45.2
N$56: DRV3.18 R42.1
N$57: GRN5.C R50.1
N$58: R49.1 RED5.C
N$60: DIR-Y.P$1 M7.D6
N$61: DIR-X.P$1 M7.D5
N$62: M7.D11 STEP-SP.P$1
N$69: LED1.A LED1.C LED2.A LED2.C
N$70: POWER2.A R38.2
N$71: LED3.A LED3.C LED4.A LED4.C
N$72: DIRECTION1.P$1 M12.D13
N$73: ENBL1.P$1 M12.D11
N$74: R41.1 U$38.P$2
N$75: C33.1 R41.2
O: O.1@1 U$19.P$39 U$19.P$40
SCL: R1.2 U$1.P$45 U$2.P$10
SCL2: R11.2 U$14.P$45 U$15.P$10
SCL3: M7.A5 U$19.P$45
SCL5: M12.A5 U$35.P$45
SDA: R2.2 U$1.P$14 U$2.P$11
SDA2: R28.2 U$14.P$14 U$15.P$11
SDA3: M7.A4 U$19.P$14
SDA5: M12.A4 U$35.P$14
STEP: STEP-SP.P$2 STEP-X.P$2 STEP-Y.P$2 STEP-Z.P$2 U$19.P$22 U$19.P$23 U$19.P$24 U$19.P$54 U$19.P$55 U$19.P$56
STEP1: DRV1.22 U$6.P$22@1
STEP2: DRV2.22 U$10.P$22@1
STEP3: DRV3.22 U$23.P$22@1
STEP5: ENBL1.P$2 U$35.P$22 U$35.P$23 U$35.P$24 U$35.P$54 U$35.P$55 U$35.P$56
SW: L1.2 U$2.P$4
SW2: L2.2 U$15.P$4
SW4: D2.A U$38.P$4 U$39.2
U: U$1.P$33 U$1.P$34 U$2.P$17 U$2.P$18
U1: U$14.P$33 U$14.P$34 U$15.P$17 U$15.P$18
U2: U$19.P$33 U$19.P$34 YELLOW.1@1
V: U$1.P$35 U$1.P$36 U$2.P$19 U$2.P$20
V1: U$14.P$35 U$14.P$36 U$15.P$19 U$15.P$20
V2: RED4.1@1 U$19.P$35 U$19.P$36
V3P2: C20.2 R11.1 R28.1 U$15.P$9
V3P3: C7.2 R1.1 R2.1 U$2.P$9
VCC: C2.1 U$1.VCC@1 U$1.VCC@2 U$1.VCC@3 U$2.P$23 U$2.P$24 U$3.P$3
VCC1: C8.1 C9.1 DRV1.4 DRV1.11 R12.1 U$6.VCC@1 U$6.VCC@2 U$6.VCC@3 U$7.P$3
VCC2: C13.1 C14.1 DRV2.4 DRV2.11 R22.1 U$10.VCC@1 U$10.VCC@2 U$10.VCC@3 U$11.P$3
VCC3: C17.1 U$14.VCC@1 U$14.VCC@2 U$14.VCC@3 U$15.P$23 U$15.P$24 U$16.P$3
VCC5: C28.1 C29.1 DRV3.4 DRV3.11 R46.1 U$23.VCC@1 U$23.VCC@2 U$23.VCC@3 U$24.P$3
VCC6: CN1.PWR1 U$19.P$41 U$19.P$42 U$19.P$43
VCC8: CN3.PWR1 M12.VIN
VCP1: C9.2 DRV1.3 R12.2
VCP2: C14.2 DRV2.3 R22.2
VCP3: C29.2 DRV3.3 R46.2
VIN: M7.VIN
VREG: C5.2 L1.1 U$2.P$6
VREG2: C19.2 L2.1 U$15.P$6
W: U$1.P$37 U$1.P$38 U$2.P$21 U$2.P$22
W1: U$14.P$37 U$14.P$38 U$15.P$21 U$15.P$22
W2: BLACK.1@1 U$19.P$37 U$19.P$38